# Altium PCB PCB1.PcbDoc
Units mm, origin at the board's own origin, x right, y up, seen from the top; angles counter-clockwise.
Board outline 90.42 x 117.35 mm, 2 copper layers (Top Layer, Bottom Layer); 4 components, 25 nets, 73 pads, 0 vias.
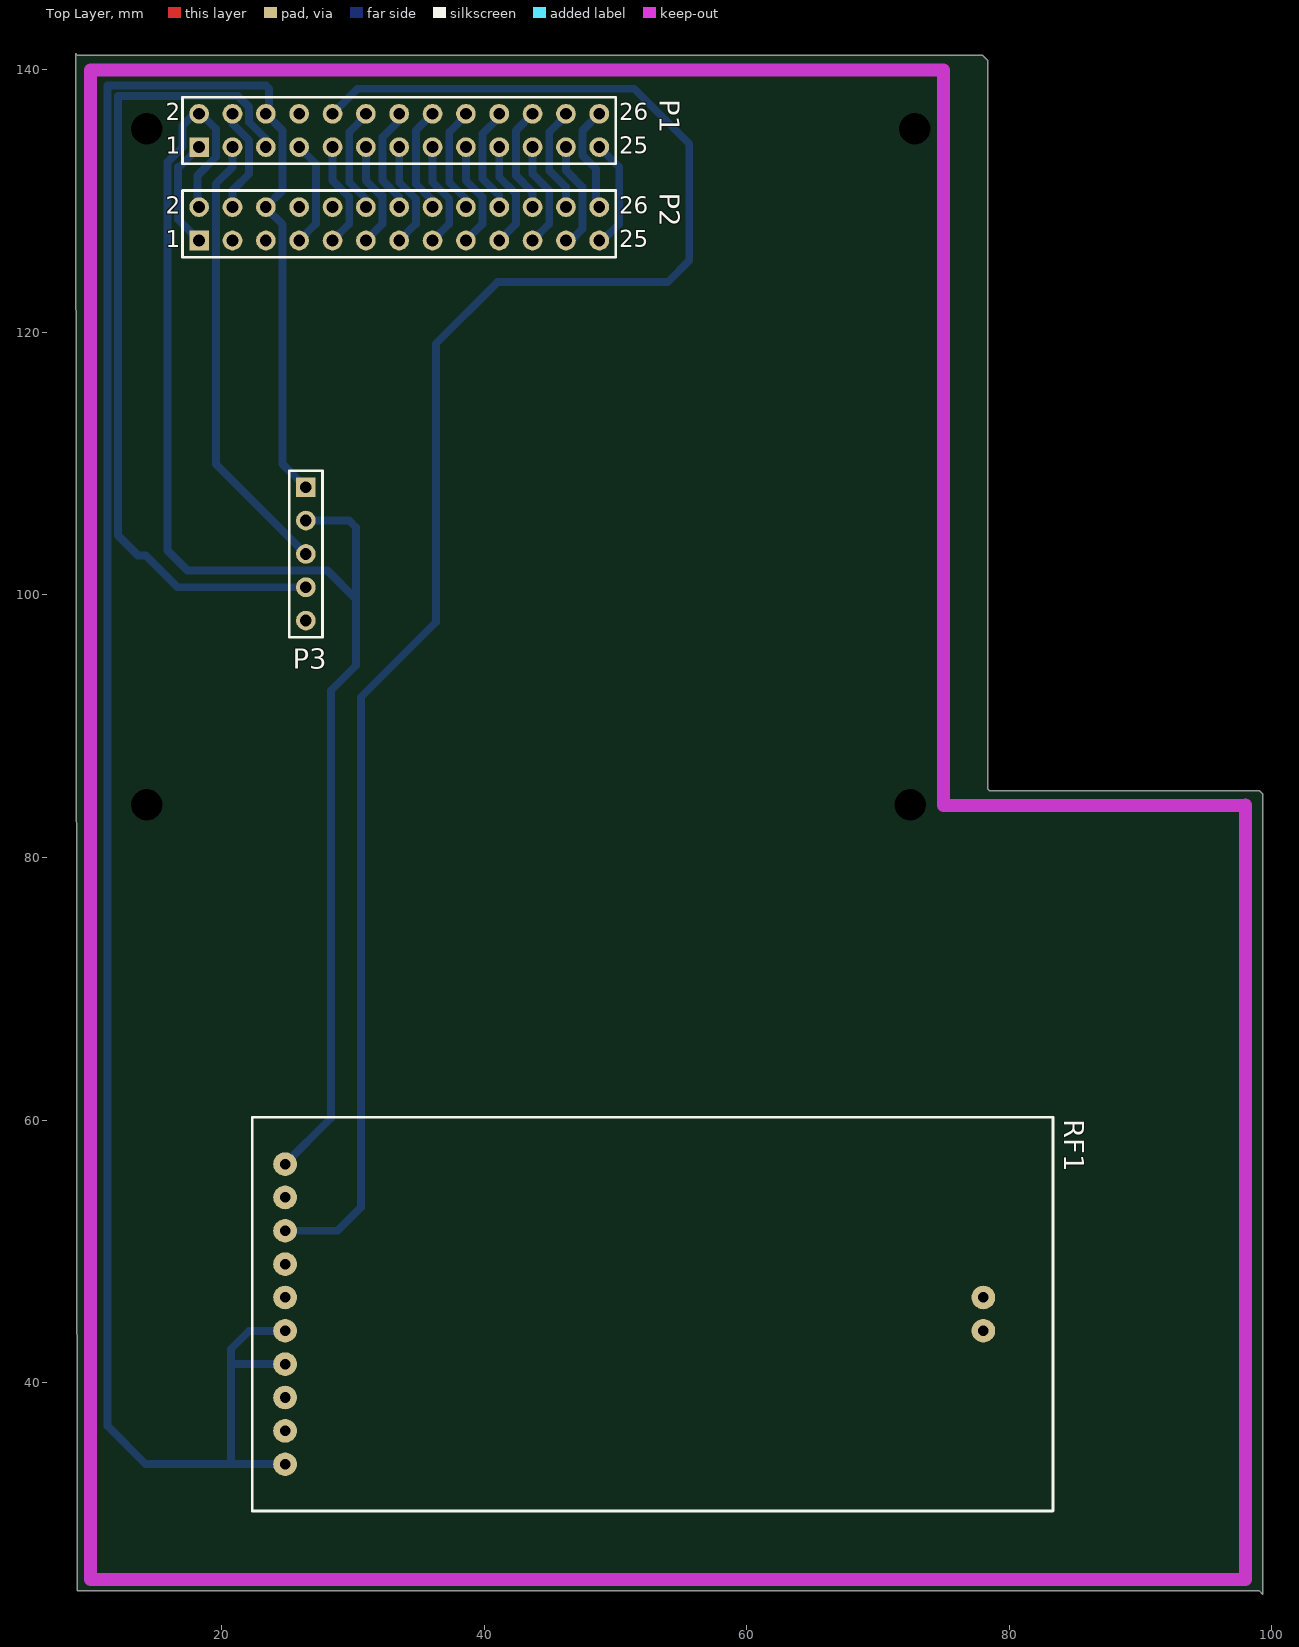
[diagram p0: Top Layer view]
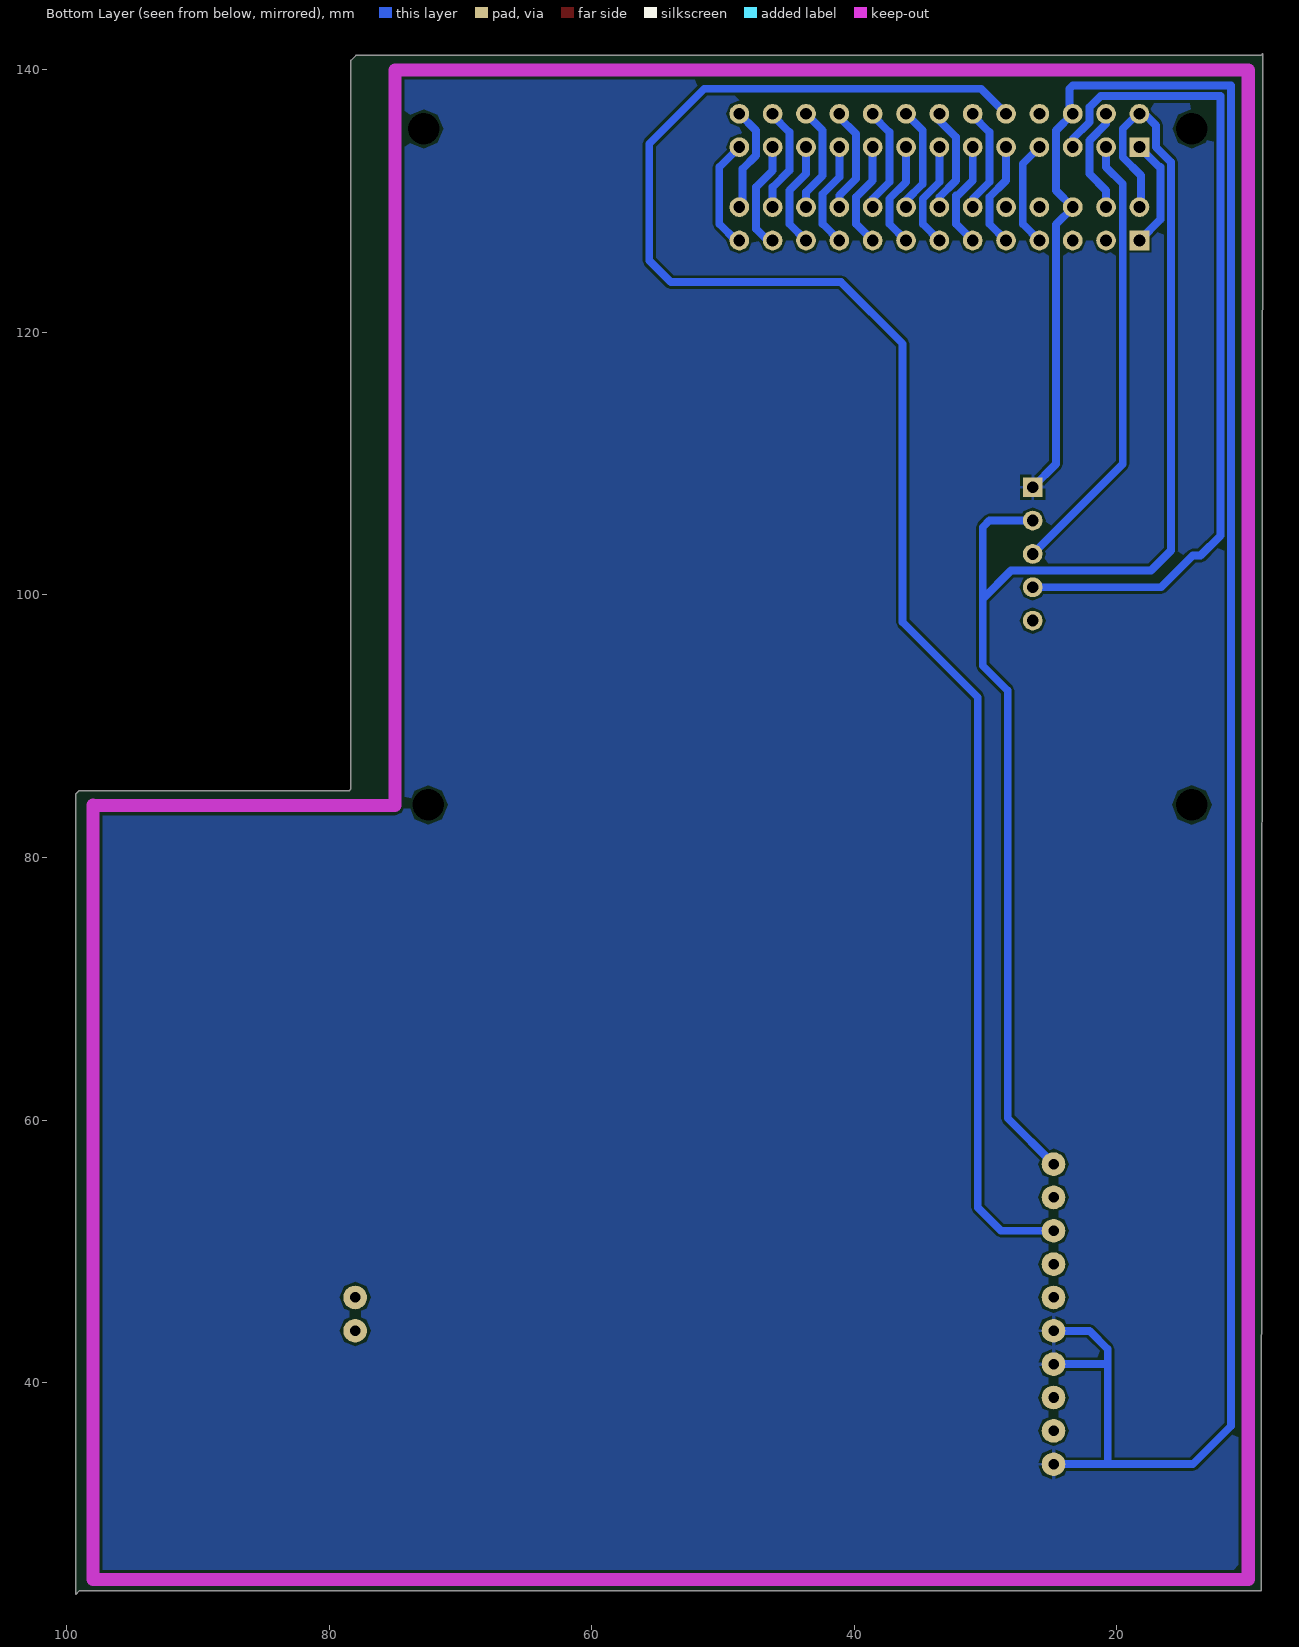
[diagram p1: Bottom Layer view, seen from below]

## Layer stack, top to bottom
Top Layer: signal copper 0.0356
Dielectric: dielectric 0.32, FR-4, Dk 4.8
Bottom Layer: signal copper 0.0356

## Board outline
8.89,141.224 9.017,141.097 77.978,141.097 78.359,140.716 78.359,85.217 78.486,85.09 99.06,85.09 99.314,84.836 99.314,23.876 99.06,24.13 9.017,24.13

## Design rules (kind name [scope] priority, off if disabled: settings)
Clearance [All] p1: gap=0.2
PolygonConnect [All] p1: connectstyle=Relief reliefconductorwidth=0.254 reliefentries=4 polygonreliefangle="90 Angle"
RoutingVias [All] p1: holewidth=0.711 width=1.27 viastyle="Through Hole" minholewidth=0.711 minwidth=1.27 maxholewidth=0.711 maxwidth=1.27
SilkscreenOverComponentPads [All] p1: minsilkscreentomaskgap=0.254
SolderMaskExpansion [All] p1: expansion=0.102
Width [All] p1: maxlimit=0.6 minlimit=0.6 preferedwidth=0.6
27 further rules are at their usual default settings.

## Components (designator, comment, footprint, x,y, rotation, side; value= is the part's Value field where it differs from the comment)
P1 "RPi" HDR2X13 18.288,134.112 r0 top
P2 "LCD" HDR2X13 18.288,127 r0 top
P3 "RTC" HDR1X5 26.416,108.204 r270 top
RF1 "RF_Module" PCBComponent_1 52.832,45.212 r0 top

## Footprints (in the part's own frame and the unit in brackets; to place one, negate y for a bottom-side part, rotate by r counter-clockwise, add the part's x,y. Pads: shape width x height; smd on the part's side, far side on the other; paste and mask are expansions set on the pad)
HDR1X5 [mm] "Connector; Header; 5 Position"
  rect 1.5x1.5 hole 0.9: 1(0,0)
  round 1.5 hole 0.9: 2(2.54,0) 3(5.08,0) 4(7.62,0) 5(10.16,0)
  silkscreen extent -1.27,-1.27 11.43,1.27
HDR2X13 [mm] "Connector; Header; 13x2 Position"
  rect 1.5x1.5 hole 0.9: 1(0,0)
  round 1.5 hole 0.9: 2(0,2.54) 3(2.54,0) 4(2.54,2.54) 5(5.08,0) 6(5.08,2.54) 7(7.62,0) 8(7.62,2.54) 9(10.16,0) 10(10.16,2.54) 11(12.7,0) 12(12.7,2.54) 13(15.24,0) 14(15.24,2.54) 15(17.78,0) 16(17.78,2.54) 17(20.32,0) 18(20.32,2.54) 19(22.86,0) 20(22.86,2.54) 21(25.4,0) 22(25.4,2.54) 23(27.94,0) 24(27.94,2.54) 25(30.48,0) 26(30.48,2.54)
  silkscreen extent -1.27,-1.27 31.75,3.81
PCBComponent_1 [mm]
  round 1.8 hole 0.8: 1(-28,11.43) 2(-28,8.89) 3(-28,6.35) 4(-28,3.81) 5(-28,1.27) 6(-28,-1.27) 7(-28,-3.81) 8(-28,-6.35) 9(-28,-8.89) 10(-28,-11.43) 11(25.2,1.27) 12(25.2,-1.27)
  silkscreen extent -30.5,-15 30.5,15

## Part data
P1 P2: library part "Header 13X2", "Header, 13-Pin, Dual row"
P3: library part "Header 5", "Header, 5-Pin"
RF1: library part Component_1

## Free pads (board coordinates)
  round 1.8 hole 2.4: 0(14.288,84) 0(72.454,84) 0(72.8,135.5) 1(14.288,135.5)

## Nets (pads, with @x,y where several pads share a name; then routed paths per layer and width w, separated by ;. In a path a pad name is that pad's centre, name@x,y a point inside that pad or via, vN(x,y) a via of type N, cw(c..) or ccw(c..) an arc to the next point about the centre after c; other vN are vias at no path point)
NetP1_1: P1.1 P2.1 | length 8.5
  Bottom Layer w0.6: P2.1 16.675,128.613 16.675,132.588 16.764,132.588 P1.1
NetP1_2: P1.2 P2.2 P3.2 RF1.1 | length 113.5
  Bottom Layer w0.6: P2.2 18.161,129.667 18.161,131.953 19.558,133.35 19.558,135.509 18.415,136.652 P1.2 17.907,136.652 17.018,135.763 17.018,134.112 15.875,132.969 15.875,103.378 17.399,101.854 28.067,101.854 30.226,99.695 ; RF1.1 28.321,60.131 28.321,92.71 30.226,94.615 30.226,99.695 ; P3.2 29.718,105.664 30.226,105.156 30.226,99.695
NetP1_3: P1.3 P3.3 | length 34.4
  Bottom Layer w0.6: P1.3 20.828,132.588 19.558,131.318 19.558,126.111 19.558,109.982 P3.3
NetP1_4: P1.4 P2.4 | length 8.2
  Bottom Layer w0.6: P2.4 20.828,130.81 22.098,132.08 22.098,134.62 20.828,135.89 P1.4
NetP1_5: P1.5 P3.4 | length 63.3
  Bottom Layer w0.6: P1.5 23.368,134.747 22.098,136.017 22.098,136.398 22.078,136.418 22.078,137.17 21.237,138.011 12.103,138.011 12.103,104.521 13.627,102.997 14.224,102.997 16.637,100.584 P3.4
NetP1_6: P1.6 P2.6 P3.1 RF1.6 RF1.7 RF1.10 | length 179.6
  Bottom Layer w0.6: RF1.10 20.701,33.782 ; RF1.7 20.701,41.402 ; RF1.6 22.098,43.942 20.701,42.545 20.701,41.402 ; P3.1 24.638,109.982 24.638,128.23 23.368,129.5 P2.6 24.638,130.81 24.638,135.382 P1.6 23.622,136.906 23.622,138.557 23.368,138.811 11.303,138.811 11.303,36.703 14.224,33.782 20.701,33.782 ; 20.701,33.782 20.701,41.402
NetP1_7: P1.7 P2.7 | length 8.2
  Bottom Layer w0.6: P2.7 27.178,128.27 27.178,132.842 P1.7
NetP1_9: P1.9 P2.9 | length 8.2
  Bottom Layer w0.6: P2.9 29.718,128.27 29.718,130.302 28.448,131.572 P1.9
NetP1_10: P1.10 RF1.3 | length 135.6
  Bottom Layer w0.6: RF1.3 28.829,51.562 30.607,53.34 30.607,92.202 36.322,97.917 36.322,119.126 41.021,123.825 53.975,123.825 55.626,125.476 55.626,134.366 51.435,138.557 30.353,138.557 P1.10 P1.10@28.448,136.271
NetP1_11: P1.11 P2.11 | length 8.2
  Bottom Layer w0.6: P2.11 32.258,128.27 32.258,130.429 32.131,130.429 30.988,131.572 P1.11
NetP1_12: P1.12 P2.12 | length 8.2
  Bottom Layer w0.6: P2.12 30.988,130.175 29.718,131.445 29.718,135.255 30.988,136.525 P1.12
NetP1_13: P1.13 P2.13 | length 8.2
  Bottom Layer w0.6: P2.13 34.798,128.27 34.798,130.175 33.528,131.445 P1.13
NetP1_14: P1.14 P2.14 | length 8.2
  Bottom Layer w0.6: P2.14 33.528,130.302 32.258,131.572 32.258,134.874 33.528,136.144 P1.14
NetP1_15: P1.15 P2.15 | length 8.2
  Bottom Layer w0.6: P2.15 37.338,128.27 37.338,130.175 36.068,131.445 P1.15
NetP1_16: P1.16 P2.16 | length 7.7
  Bottom Layer w0.6: P2.16@36.068,130.048 34.798,131.318 34.798,135.382 P1.16
NetP1_17: P1.17 P2.17 | length 8.2
  Bottom Layer w0.6: P2.17 39.878,128.27 39.878,130.302 38.608,131.572 P1.17
NetP1_18: P1.18 P2.18 | length 8.2
  Bottom Layer w0.6: P2.18 38.608,130.175 37.338,131.445 37.338,135.255 38.608,136.525 P1.18
NetP1_19: P1.19 P2.19 | length 8.2
  Bottom Layer w0.6: P2.19 42.418,128.27 42.418,130.556 41.148,131.826 P1.19
NetP1_20: P1.20 P2.20 | length 8.2
  Bottom Layer w0.6: P2.20 41.148,130.429 39.878,131.699 39.878,135.128 41.148,136.398 P1.20
NetP1_21: P1.21 P2.21 | length 8.2
  Bottom Layer w0.6: P2.21 44.958,128.27 44.958,130.81 43.688,132.08 P1.21
NetP1_22: P1.22 P2.22 | length 8.2
  Bottom Layer w0.6: P2.22 43.688,130.683 42.418,131.953 42.418,135.382 P1.22
NetP1_23: P1.23 P2.23 | length 8.4
  Bottom Layer w0.6: P2.23 46.609,127 47.498,127.889 47.498,131.064 46.228,132.334 P1.23
NetP1_24: P1.24 P2.24 | length 8.2
  Bottom Layer w0.6: P2.24 46.228,131.064 44.958,132.334 44.958,135.255 46.228,136.525 P1.24
NetP1_25: P1.25 P2.25 | length 8.5
  Bottom Layer w0.6: P2.25 49.022,127 50.292,128.27 50.292,132.588 P1.25
NetP1_26: P1.26 P2.26 | length 8.2
  Bottom Layer w0.6: P2.26 48.514,129.794 48.514,132.461 47.498,133.477 47.498,135.382 P1.26
pads on no net: P1.8 P2.3 P2.5 P2.8 P2.10 P3.5 RF1.2 RF1.4 RF1.5 RF1.8 RF1.9 RF1.11 RF1.12

## Polygon pours and split planes (outlines as drawn)
NetP1_6 on Bottom Layer "Bottom Layer-No Net" (solid): 10,139.7 10.3,140 75,140 75.184,139.816 75.184,83.947 75.438,83.693 98,83.693 98,25.273 97.727,25 10,25

## Keep-outs
Keep-Out Layer:
  lines w0.2: 97.947,83.947 98,84
  lines w1: 75,139.911 75,83.947 97.947,83.947 ; 75,140 10,140 10,25 98,25 98,84

## Text inside footprints (layer, text, board x,y; h text height)
P1: Top Overlay "2" at 15.748,136.144 h1.27; Top Overlay "1" at 15.748,133.604 h1.27; Top Overlay "25" at 50.292,133.604 h1.27; Top Overlay "26" at 50.292,136.144 h1.27
P2: Top Overlay "2" at 15.748,129.032 h1.27; Top Overlay "1" at 15.748,126.492 h1.27; Top Overlay "25" at 50.292,126.492 h1.27; Top Overlay "26" at 50.292,129.032 h1.27